# Altium PCB beacon_pcb.PcbDoc
Units mil, origin at the board's own origin, x right, y up, seen from the top; angles counter-clockwise.
Board outline 3137.8 x 2285.43 mil, 2 copper layers (Top Layer, Bottom Layer); 40 components, 32 nets, 199 pads, 108 vias.
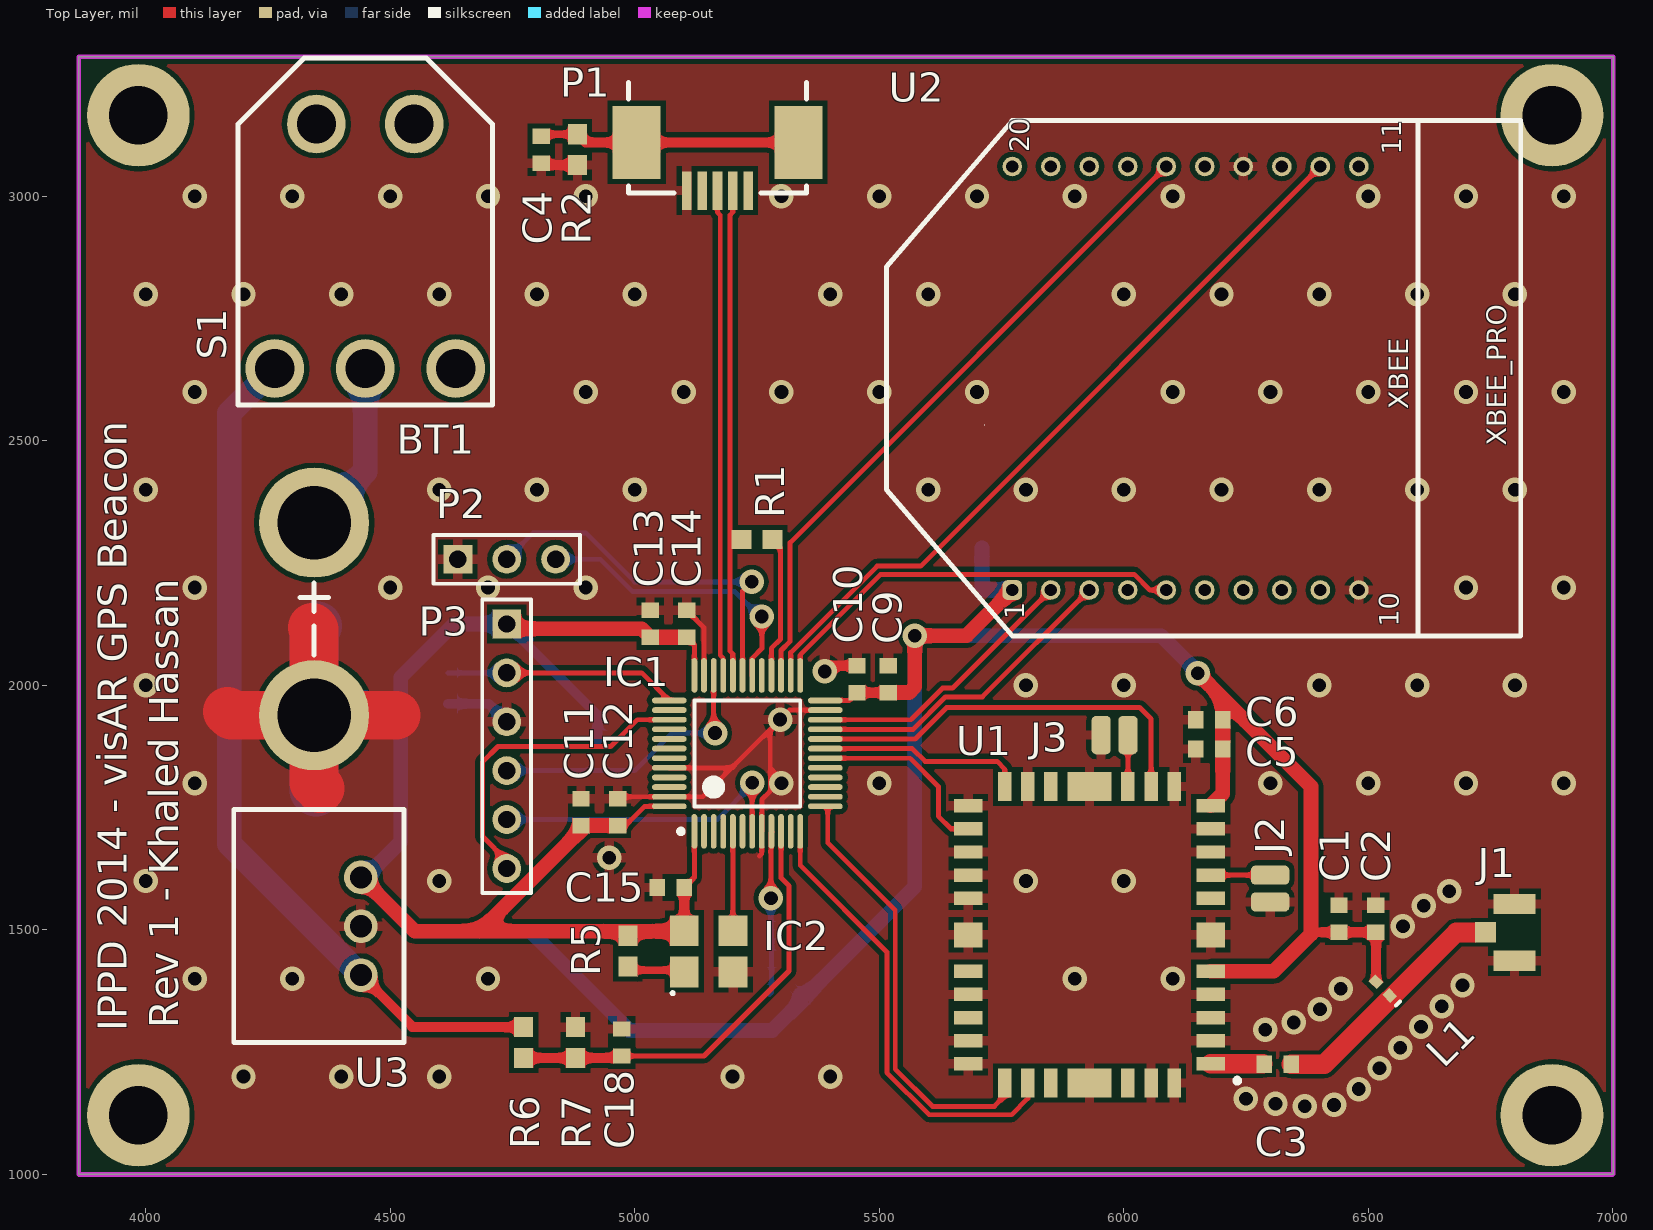
[diagram p0: Top Layer view]
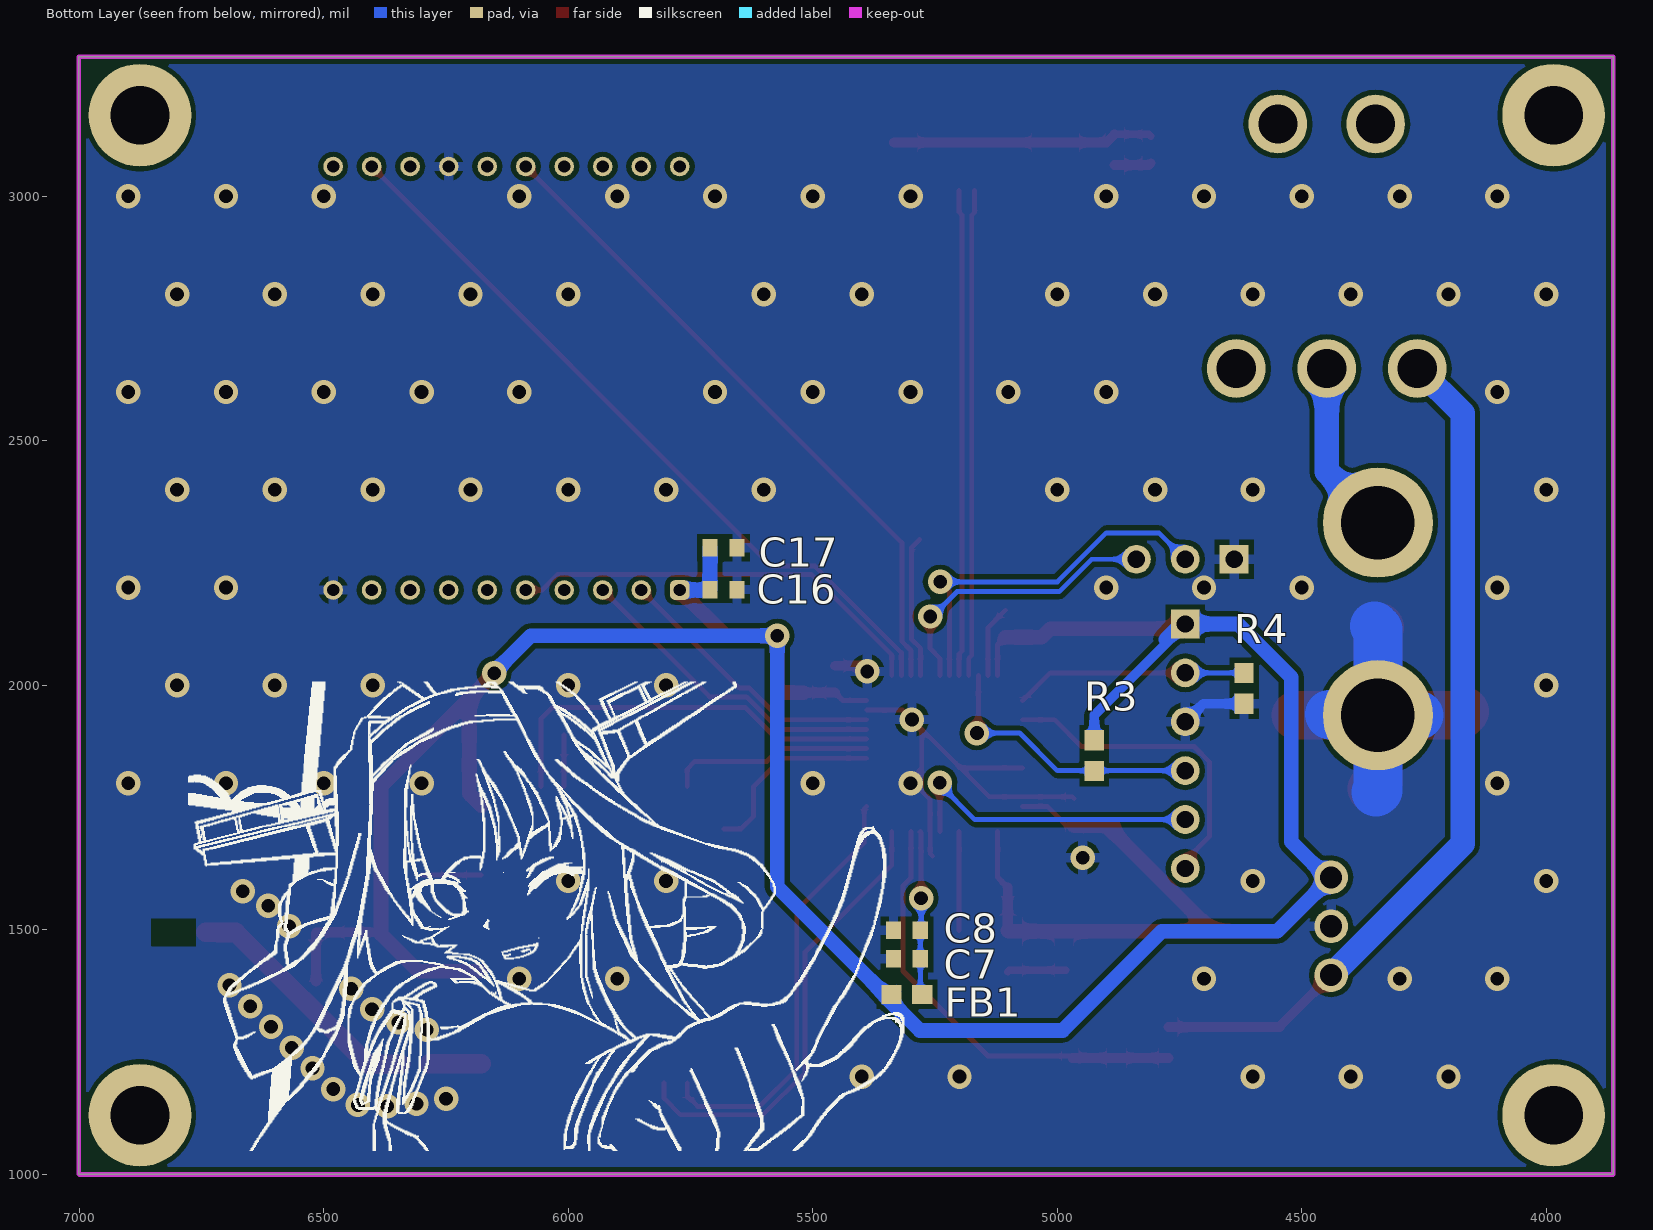
[diagram p1: Bottom Layer view, seen from below]

## Layer stack, top to bottom
Top Solder: solder mask 0.4, Solder Resist, Dk 3.5
Top Layer: signal copper 1.4
Dielectric 1: dielectric 12.6, FR-4, Dk 4.8
Bottom Layer: signal copper 1.4
Bottom Solder: solder mask 0.4, Solder Resist, Dk 3.5

## Board outline
3863.19,1000 3863.19,3285.43 7000.98,3285.43 7000.98,1000.98 7000,1000

## Design rules (kind name [scope] priority, off if disabled: settings)
Clearance GPS_Waveguide_Gap [(InNet('NetC3_1') OR InNet('NetC3_2')) vs InPolygon] p1: gap=7.88
Clearance Clearance_2 [InPolygon vs NOT ((InNet('NetC3_1') OR InNet('NetC3_2')))] p2: gap=10
Clearance [All] p3: gap=7
DiffPairsRouting [All] p1: maxlimit=10 minlimit=10 mostfreqgap=10 toplayer_minwidth=10 toplayer_maxwidth=15 toplayer_prefwidth=15 bottomlayer_minwidth=10 bottomlayer_maxwidth=15 bottomlayer_prefwidth=15 maxuncoupledlength=500
PolygonConnect [All] p1: connectstyle=Relief reliefconductorwidth=20 reliefentries=4 polygonreliefangle="90 Angle" airgapwidth=10
RoutingVias [All] p1: holewidth=28 width=50 viastyle="Through Hole" minholewidth=28 minwidth=50 maxholewidth=28 maxwidth=50
SolderMaskExpansion [All] p1: expansion=4
Width [All] p1: maxlimit=200 minlimit=10 preferedwidth=10 minimp=50.000000 maximp=50.000000 favimp=50.000000
29 further rules are at their usual default settings.

## Classes and differential pairs
differential pair USB: +USBD_P -USBD_N

## Components (designator, comment, footprint, x,y, rotation, side; value= is the part's Value field where it differs from the comment)
BT1 "BATWIRE" BATWIRE12 4344.49,2332.68 r270 top
C1 "Cap Semi" 1608[0603] 6440.08,1522.56 r270 top
C2 "Cap Semi" 1608[0603] 6515.08,1522.56 r270 top
C3 "Cap Semi" 1608[0603] 6315,1225 r180 top
C4 "Cap Semi" 1608[0603] 4809.06,3095.47 r90 top
C5 "Cap Semi" 1608[0603] 6175,1870 r0 top
C6 "Cap Semi" 1608[0603] 6175,1930 r0 top
C7 "Cap Semi" 1608[0603] 5307.44,1441.26 r180 bottom
C8 "Cap Semi" 1608[0603] 5307.44,1499.02 r180 bottom
C9 "Cap Semi" 1608[0603] 5518.7,2012.8 r270 top
C10 "Cap Semi" 1608[0603] 5454.72,2012.8 r270 top
C11 "Cap Semi" 1608[0603] 4890.31,1740.91 r270 top
C12 "Cap Semi" 1608[0603] 4965.31,1740.91 r270 top
C13 "Cap Semi" 1608[0603] 5031.5,2125.98 r270 top
C14 "Cap Semi" 1608[0603] 5106.3,2125.98 r270 top
C15 "Cap Semi" 1608[0603] 5073.82,1586.61 r0 top
C16 "Cap Semi" 1608[0603] 5682.64,2195.87 r0 bottom
C17 "Cap Semi" 1608[0603] 5682.64,2281.5 r0 bottom
C18 "Cap Semi" 1608[0603] 4973.43,1269.69 r270 top
FB1 "FBead" RES0603 5307.44,1368.11 r0 bottom
IC1 "STM32F103CBT6" STM-LQFP48_N 5230.31,1860.91 r90 top
IC2 "Si501/2/3" "3.2 x 5 mm 4-pin DFN" 5077.76,1395.67 r0 top
J1 "uFL Jack" H9161CT-ND 6799.21,1495.08 r270 top
J2 "SMD Jumper" "SMD 2PAD" 6295.28,1584.68 r90 top
J3 "SMD Jumper" "SMD 2PAD" 5981.38,1902.56 r0 top
L1 "Inductor" 0402-A 6530,1380 r135 top
P1 "UX60SC-MB-5ST" UX60SC-MB-5ST 5169.29,3011.81 r180 top
P2 "Header 3" HDR1X3 4638.27,2257.87 r0 top
P3 "Header 6" HDR1X6 4738.27,2125.63 r270 top
R1 "Res" RES0603 5250,2298.23 r180 top
R2 "Res" RES0603 4882.87,3095.47 r270 top
R3 "Res" RES0603 4924.21,1856.3 r270 bottom
R4 "Res" RES0603 4618.11,1994.09 r270 bottom
R5 "Res" RES0603 4986.22,1456.69 r270 top
R6 "Res" RES0603 4772.64,1269.69 r270 top
R7 "Res" RES0603 4878.94,1269.69 r90 top
S1 "M2012S2A2W30" M2012S2A2W30 4449,3148 r180 top
U1 "S1315F8-RAW" S1315F8-RAW 5930,1490 r90 top
U2 "XBEE" XBEE/PRO 5340,2160 r90 top
U3 "R-78E3.3-0.5" R-78E3.3-0.5 4439.96,1407.48 r90 top

## Footprints (in the part's own frame and the unit in brackets; to place one, negate y for a bottom-side part, rotate by r counter-clockwise, add the part's x,y. Pads: shape width x height; smd on the part's side, far side on the other; paste and mask are expansions set on the pad)
"3.2 x 5 mm 4-pin DFN" [mm] "Footprint for Si501 Oscillator"
  rect 1.5x1.6 smd: 1(0.6,0.47) 2(3.14,0.47) 3(3.14,2.61) 4(0.6,2.61)
  silkscreen extent -0.03,-0.67 0.03,-0.61
0402-A [mm] "Chip Inductor, Body 1.0x0.5mm, IPC High Density"
  rect 0.6x0.5 smd: 1(-0.5,0) 2(0.5,0)
  silkscreen extent -1.1,-0.15 -1.1,0.15, body extent -0.55,-0.3 0.55,0.3, height 0.55
1608[0603] [mm] "Chip Capacitor, Body 1.6x0.8mm, IPC High Density"
  rect 0.8x0.9 smd: 1(-0.7,0) 2(0.7,0)
  body extent -0.87,-0.48 0.87,0.48, height 1.3
BATWIRE12 [mm] "Two 12AWG wires soldered directly to the board"
  round 5.715 hole 3.81: +(0,0) -(10,0)
  silkscreen extent 3.13,-0.75 6.87,0.75
H9161CT-ND [mm]
  rect 1.05x2.2 smd: GND(-1.475,0) GND(1.475,0)
  rect 1.05x1.1 smd: SIG(0,-1.5)
  Mechanical 1 keep-out region: -0.65,-0.55 0.625,-0.55 0.625,1.1 -0.65,1.1
HDR1X3 [mm] "Connector; Header; 3 Position"
  rect 1.5x1.5 hole 0.9: 1(0,0)
  round 1.5 hole 0.9: 2(2.54,0) 3(5.08,0)
  silkscreen extent -1.27,-1.27 6.35,1.27
HDR1X6 [mm] "Connector; Header; 6 Position"
  rect 1.5x1.5 hole 0.9: 1(0,0)
  round 1.5 hole 0.9: 2(2.54,0) 3(5.08,0) 4(7.62,0) 5(10.16,0) 6(12.7,0)
  silkscreen extent -1.27,-1.27 13.97,1.27
M2012S2A2W30 [mil]
  round 120 hole 80: 0(-100,0) 0(100,0) 1(185,500) 2(0,500) 3(-185,500)
  silkscreen extent -260,-135 260,575
R-78E3.3-0.5 [mm]
  round 1.75 hole 1.15: 1(0,0) 2(2.54,0) 3(5.08,0)
  silkscreen extent -3.5,-2.25 8.6,6.6
RES0603 [mm] "Chip Resistor, 2-Leads, Body 1.60x0.80mm, IPC Medium Density"
  rect 1.05x1 smd: 1(-0.8,0) 2(0.8,0)
  body extent -0.88,-0.48 0.87,0.47, height 0.8
S1315F8-RAW [mm]
  rect 0.7x1.5 smd: 1(-6.7,-6.3) 2(-5.5,-6.3) 3(-4.3,-6.3) 4(-3.1,-6.3) 5(-1.9,-6.3) 7(1.9,-6.3) 8(3.1,-6.3) 9(4.3,-6.3) 10(5.5,-6.3) 11(6.7,-6.3) 19(6.7,6.3) 20(5.5,6.3) 21(4.3,6.3) 22(3.1,6.3) 23(1.9,6.3) 25(-1.9,6.3) 26(-3.1,6.3) 27(-4.3,6.3) 28(-5.5,6.3) 29(-6.7,6.3)
  rect 1.3x1.5 smd: 6(0,-6.3) 24(0,6.3)
  rect 1.5x0.7 smd: 12(7.7,-4.4) 13(7.7,-3.2) 14(7.7,-2) 16(7.7,2) 17(7.7,3.2) 18(7.7,4.4) 30(-7.7,4.4) 31(-7.7,3.2) 32(-7.7,2) 34(-7.7,-2) 35(-7.7,-3.2) 36(-7.7,-4.4)
  rect 1.5x2.3 smd: 15(7.7,0) 33(-7.7,0)
  silkscreen extent -7.7,-7.8 -7.45,-7.55
"SMD 2PAD" [mm]
  rrect50% 1x2 smd: 1(-0.702,-0.105) 2(0.695,-0.105)
STM-LQFP48_N [mm] "QFP, 48-Leads, Body 7x7mm, Pitch 0.5mm, IPC Medium Density"
  oval 1.8x0.3 smd: 1(-4.05,2.75) 2(-4.05,2.25) 3(-4.05,1.75) 4(-4.05,1.25) 5(-4.05,0.75) 6(-4.05,0.25) 7(-4.05,-0.25) 8(-4.05,-0.75) 9(-4.05,-1.25) 10(-4.05,-1.75) 11(-4.05,-2.25) 12(-4.05,-2.75) 25(4.05,-2.75) 26(4.05,-2.25) 27(4.05,-1.75) 28(4.05,-1.25) 29(4.05,-0.75) 30(4.05,-0.25) 31(4.05,0.25) 32(4.05,0.75) 33(4.05,1.25) 34(4.05,1.75) 35(4.05,2.25) 36(4.05,2.75)
  oval 0.3x1.8 smd: 13(-2.75,-4.05) 14(-2.25,-4.05) 15(-1.75,-4.05) 16(-1.25,-4.05) 17(-0.75,-4.05) 18(-0.25,-4.05) 19(0.25,-4.05) 20(0.75,-4.05) 21(1.25,-4.05) 22(1.75,-4.05) 23(2.25,-4.05) 24(2.75,-4.05) 37(2.75,4.05) 38(2.25,4.05) 39(1.75,4.05) 40(1.25,4.05) 41(0.75,4.05) 42(0.25,4.05) 43(-0.25,4.05) 44(-0.75,4.05) 45(-1.25,4.05) 46(-1.75,4.05) 47(-2.25,4.05) 48(-2.75,4.05)
  silkscreen extent -4.17,-2.75 2.75,3.57, body extent -3.5,-3.5 3.5,3.5, height 1.6
UX60SC-MB-5ST [mm] "USB Mini-B Recepticle"
  rect 0.5x2 smd: 1(-1.6,0) 2(-0.8,0) 3(0,0) 4(0.8,0) 5(1.6,0)
  rect 2.5x3.8 smd: SHD(-4.2,-2.5) SHD(4.2,-2.5)
  silkscreen extent -4.62,-5.63 4.62,0.13, body extent -4.9,-6.61 4.9,0.39, height 3.95
XBEE/PRO [mil]
  rrect50% 40x40 hole 25: 1(35,-432.09)
  round 40 hole 25: 2(35,-510.83) 3(35,-589.57) 4(35,-668.31) 5(35,-747.05) 6(35,-825.79) 7(35,-904.53) 8(35,-983.27) 9(35,-1062.01) 10(35,-1140.75) 11(901.14,-1140.75) 12(901.14,-1062.01) 13(901.14,-983.27) 14(901.14,-904.53) 15(901.14,-825.79) 16(901.14,-747.05) 17(901.14,-668.31) 18(901.14,-589.57) 19(901.14,-510.83) 20(901.14,-432.09)
  silkscreen extent -59,-1472 995,-175

## Part data
BT1: "Two large gauge leads soldered directly to the board."
C1 C2 C3 C4 C5 C6 C7 C8 C9 C10 C11 C12 C13 C14 C15 C16 C17 C18: "Capacitor (Semiconductor SIM Model)"
FB1: "Ferrite Bead"
IC1: library part STM32F103C8T6, "STM32 ARM-based 32-bit MCU with 64 Kbytes Flash, 48-pin LQFP, Industrial Temperature"
P1: "USB Mini B Metal Shield SMT"
P2: "Header, 3-Pin"
P3: "Header, 6-Pin"
S1: library part SW-SPDT, "SPDT Subminiature Toggle Switch, Right Angle Mounting, Vertical Actuation"

## Free pads (board coordinates)
  round 210 hole 120: 0(3985,1121) 0(3985,3166) 0(6876,1121) 0(6876,3166)

## Via types
v1: diameter 50, hole 28, Top Layer to Bottom Layer, tented both sides, 98 vias
v2: diameter 50, hole 28, Top Layer to Bottom Layer, 10 vias

## Nets (pads, with @x,y where several pads share a name; then routed paths per layer and width w, separated by ;. In a path a pad name is that pad's centre, name@x,y a point inside that pad or via, vN(x,y) a via of type N, cw(c..) or ccw(c..) an arc to the next point about the centre after c; other vN are vias at no path point)
+3.3: C1.2 C2.2 C5.2 C6.2 C9.2 C10.2 C11.2 C12.2 C13.2 C14.2 C15.2 C16.2 C17.2 FB1.2 IC1.1 IC1.24 IC1.36 IC1.48 IC2.4 L1.2 P3.1 R3.1 R5.1 U1.5 U1.11 U2.1 U3.3 | length 7492.9
  Top Layer w10: C12.2 4981.06,1713.35 5020.35,1752.64 IC1.48 ; C15.2 5122.05,1607.28 IC1.1 ; C14.2 5122.05,2082.68 IC1.36 ; IC1.24 5438.66,1969.17 C10.2
  Top Layer w20: IC2.4 C15.2 ; C10.2 C9.2 ; 6386.73,1495 C1.2 C2.2 ; L1.2 C2.2@6516.08,1494
  Top Layer w30: U3.3 4550.2,1497.24 4682.75,1497.24 ; P3.1 4738.27,2115.8 5014.13,2115.8 C13.2 C14.2 ; C12.2 C11.2 4890.32,1704.81 4682.75,1497.24 ; IC2.4 5100.2,1497.24 4682.75,1497.24 ; C9.2 5561.02,1985.24 5572.83,1997.05 v2(5572.83,2101.38) 5678.46,2101.38 U2.1 ; v2(6151.57,2024.61) 6202.56,1973.62 ; U1.5 6306.93,1415.2 6382.87,1491.14 6382.87,1793.31 6202.56,1973.62 ; U1.11 6202.56,1778.31 C5.2 C6.2 6202.56,1973.62
  Bottom Layer w20: P3.1 4924.21,1939.69 R3.1
  Bottom Layer w30: 4777.84,2093.85 4746.06,2125.63 P3.1 4630.55,2125.63 4521.65,2016.73 4521.65,1680.12 4449.02,1607.48 U3.3 4550.2,1497.24 4786.22,1497.24 4989.17,1294.29 5281.5,1294.29 5338.94,1351.73 FB1.2 5352.36,1368.11 5572.83,1588.58 v2(5572.83,2101.38) 6076.77,2101.38 6151.57,2026.57 v2(6151.57,2024.61) ; C17.2 C16.2 5711.06,2195 U2.1
+7.4: R6.1 S1.1 U3.1 | length 1768.6
  Top Layer w20: U3.1 4544.29,1303.15 4544.29,1301.18 R6.1
  Bottom Layer w50: S1.1@4263.82,2648.62 4171.26,2556.06 4171.26,1676.18 U3.1
BATTERYMONITOR: C18.2 IC1.10 R6.2 R7.1 | length 903.2
  Top Layer w10: C18.2 5141.73,1242.13 5315.54,1415.94 5315.54,1589.97 5299.21,1606.3 IC1.10
  Top Layer w20: R6.2 R7.1 C18.2@4969.49,1238.19
CLK_8M: IC1.5 IC2.3 | length 203.9
  Top Layer w10: IC2.3@5200.79,1498.43 IC1.5 ; IC2.3@5200.79,1499.02 IC2.3
DEBUG_RX: IC1.31 P2.2 | length 764.3
  Top Layer w10: IC1.31 5220.47,2192.77 v2(5239.43,2211.72)
  Bottom Layer w10: P2.2 4792.4,2312.01 4899.61,2312.01 4999.89,2211.72 v2(5239.43,2211.72)
DEBUG_TX: IC1.30 P2.3 | length 599.1
  Top Layer w10: IC1.30 5240.16,2055.52 5260.1,2075.46 v2(5260.1,2140.85)
  Bottom Layer w10: P2.3 4929.7,2257.87 4995.98,2191.6 5205.07,2191.6 5255.81,2140.85 v2(5260.1,2140.85)
GND: BT1.- C1.1 C2.1 C4.1 C5.1 C6.1 C7.1 C8.1 C9.1 C10.1 C11.1 C12.1 C13.1 C14.1 C15.1 C16.1 C17.1 C18.1 IC1.8 IC1.23 IC1.35 IC1.44 IC1.47 IC2.2 J1.GND J2.1 J3.1 P1.5 P2.1 P3.3 R2.2 R4.2 R7.2 U1.2 U1.3 U1.4 U1.6 U1.9 U1.10 U1.12 U1.15 U1.17 U1.19 U1.21 U1.22 U1.23 U1.24 U1.26 U1.28 U1.29 U1.33 U1.35 U1.36 U2.10 U2.14 U3.2 | length 2537.3
  Top Layer w10: C12.1 4969.17,1772.32 IC1.47 5139.45,1772.32 5198.5,1831.38 ; IC1.44 5198.5,1831.38 ; C14.1 5141.73,2118.11 IC1.35 ; 5254.92,1650.59 5259.84,1655.51 IC1.8 5260.28,1701.9 5260.28,1766.82 5277.16,1783.7 5277.16,1910.03 ; IC1.23 5316.61,1949.49 v2(5297.24,1930.12) 5277.16,1910.03 ; 5198.5,1831.38 5277.16,1910.03
  Top Layer w20: C4.1 4812.99,3063.98 R2.2 ; v2(5388.78,2028.54) 5400.59,2040.35 C10.1
  Top Layer w100: 4167.32,1946.85 4175.2,1938.98 BT1.- ; 4340.55,2118.11 4344.49,2114.17 BT1.- ; 4356.3,1789.37 4344.49,1801.18 BT1.- ; 4511.81,1938.98 BT1.-
  Bottom Layer w20: R4.2 4701.3,1962.6 P3.3
  Bottom Layer w100: BT1.-@4259.84,1938.98 BT1.- ; 4348.43,1781.5 4344.49,1785.43 BT1.- ; 4351.38,2121.06 4344.49,2114.17 BT1.- ; BT1.-@4443.9,1940.94 4441.93,1938.98 BT1.-
  other v1: 6370.21,1139.29 6430.15,1142.02 6310.42,1144.33 6250,1154.53 6480.64,1174.43 4200,1200 4400,1200 4600,1200 5200,1200 5400,1200 6523.07,1216.86 6565.49,1259.29 6289.37,1296.07 6607.92,1301.71 6347.55,1310.71 6401.26,1337.46 6650.35,1344.14 6443.68,1379.89 6692.77,1386.57 4100,1400 4300,1400 4700,1400 5900,1400 6100,1400 6570.96,1507.17 6613.39,1549.6 6665.62,1579.13 4000,1600 4600,1600 5800,1600 6000,1600 4100,1800 5300,1800 5500,1800 6300,1800 6500,1800 6700,1800 6900,1800 4000,2000 5800,2000 6000,2000 6400,2000 6600,2000 6800,2000 4100,2200 4500,2200 4700,2200 4900,2200 6700,2200 6900,2200 4000,2400 4600,2400 4800,2400 5000,2400 5600,2400 5800,2400 6000,2400 6200,2400 6400,2400 6600,2400 6800,2400 4100,2600 4900,2600 5100,2600 5300,2600 5500,2600 5700,2600 6100,2600 6300,2600 6500,2600 6700,2600 6900,2600 4000,2800 4200,2800 4400,2800 4600,2800 4800,2800 5000,2800 5400,2800 5600,2800 6000,2800 6200,2800 6400,2800 6600,2800 6800,2800 4100,3000 4300,3000 4500,3000 4700,3000 4900,3000 5300,3000 5500,3000 5700,3000 5900,3000 6100,3000 6500,3000 6700,3000 6900,3000
  other v2: 4947.83,1647.64
GPS_1PPS: IC1.18 U1.20 | length 387.8
  Top Layer w10: IC1.18 5563.31,1851.06 5621.06,1793.31 5621.06,1732.28 5646.81,1706.54 U1.20
GPS_DIN: IC1.12 U1.31 | length 935.8
  Top Layer w10: IC1.12 5338.58,1631.89 5515.75,1454.72 5515.75,1208.24 5601.94,1122.05 5770.67,1122.05 5804.02,1155.39 U1.31
GPS_DOUT: IC1.13 U1.30 | length 887.5
  Top Layer w10: IC1.13 5394.76,1747.64 5394.76,1678.07 5532.75,1540.09 5532.75,1215.28 5608.98,1139.05 5735.5,1139.05 5756.77,1160.32 U1.30
GPS_FIX: IC1.19 U1.18 | length 420.1
  Top Layer w10: IC1.19 5567.66,1870.75 5593.92,1844.49 5741.14,1844.49 5756.77,1828.86 U1.18
GPS_RSTN: IC1.20 U1.13 | length 840.7
  Top Layer w10: IC1.20 5573.71,1890.43 5638,1954.72 6032.48,1954.72 6055.98,1931.22 U1.13
NetBT1_+: BT1.+ S1.2 | length 359.2
  Bottom Layer w50: BT1.+ 4448.82,2437.01 S1.2@4448.82,2648.62
NetC3_1: C3.1 J1.SIG L1.1 | length 510.2
  Top Layer w40: C3.1 6410,1225 6680,1495 J1.SIG@6740.94,1495
NetC3_2: C3.2 U1.1 | length 106.7
  Top Layer w40: U1.1 C3.2@6284.76,1226.22
NetC4_2: C4.2 P1.SHD R2.1 | length 534.2
  Top Layer w15: C4.2 4812.99,3126.97 R2.1
  Top Layer w20: R2.1 4899.61,3110.24 5003.94,3110.24 P1.SHD@5334.65,3110.24
NetIC2_1: IC2.1 R5.2 | length 120.5
  Top Layer w15: R5.2@4982.28,1417.64 5097.91,1417.64 IC2.1
NetJ2_2: J2.2 U1.8 | length 121.4
  Top Layer w10: U1.8 J2.2
NetJ3_2: J3.2 U1.14 | length 105.3
  Top Layer w10: U1.14 J3.2
RSTIN: IC1.7 P3.5 | length 635.8
  Top Layer w10: IC1.7 v2(5240.16,1801.18)
  Bottom Layer w10: P3.5 5168.54,1725.63 5241.14,1798.23 v2(5240.16,1801.18)
SWCLK: IC1.37 P3.2 R4.1 | length 476.2
  Top Layer w10: P3.2 5014.41,2025.63 IC1.37
  Bottom Layer w10: R4.1 4738.23,2025.59 P3.2
SWDIO: IC1.34 P3.4 R3.2 | length 577
  Top Layer w10: IC1.34 5161.42,1905.51 v2(5164.37,1902.56)
  Bottom Layer w10: P3.4 4999.84,1825.63 5076.77,1902.56 v2(5164.37,1902.56)
SWO: IC1.39 P3.6 | length 655.9
  Top Layer w10: P3.6 4738.27,1641.65 4688.98,1690.94 4688.98,1843.5 4720.47,1875 4950.79,1875 5005.59,1929.8 IC1.39
USBD_N: IC1.32 P1.2 R1.2 | length 996.2
  Top Layer w10: IC1.32 5200.79,2064.12 5195.04,2069.87 5195.04,2961.69 5200.79,2967.44 P1.2
USBD_P: IC1.33 P1.3 | length 996.3
  Top Layer w10: P1.3 5169.29,2967.44 5175.04,2961.69 5175.04,2061.58 5181.1,2055.52 IC1.33
USBPULLUP: IC1.28 R1.1 | length 292.6
  Top Layer w10: IC1.28 5279.53,2075.79 5298.23,2094.49 5298.23,2281.5 R1.1
VDDACAPS: C7.2 C8.2 FB1.1 IC1.9 | length 337.6
  Top Layer w10: v2(5278.54,1564.96) 5278.54,1698.5 5280.51,1700.47 IC1.9
  Bottom Layer w10: FB1.1 5279.88,1372.05 C7.2 C8.2 5279.53,1499.37 5280.51,1500.35 5278.54,1502.32 v2(5278.54,1564.96)
XBEE_CTS: IC1.26 U2.12 | length 1541.6
  Top Layer w10: IC1.26 5318.9,2067.07 5495.82,2244 5584.87,2244 U2.12
XBEE_DIN: IC1.21 U2.3 | length 657.8
  Top Layer w10: IC1.21 5569.35,1910.12 5635.61,1976.38 5710.94,1976.38 U2.3
XBEE_DOUT: IC1.22 U2.2 | length 570.9
  Top Layer w10: IC1.22 5565,1929.8 5629.82,1994.63 5650.46,1994.63 U2.2
XBEE_RESET: IC1.25 U2.5 | length 872.1
  Top Layer w10: IC1.25 5338.58,2062.72 5502.86,2227 6021.56,2227 6053.56,2195 U2.5
XBEE_RTS: IC1.27 U2.16 | length 1367.1
  Top Layer w10: IC1.27 5299.21,2071.43 5317.91,2090.13 5317.91,2292.01 U2.16
pads on no net: IC1.2 IC1.3 IC1.4 IC1.6 IC1.11 IC1.14 IC1.15 IC1.16 IC1.17 IC1.29 IC1.38 IC1.40 IC1.41 IC1.42 IC1.43 IC1.45 IC1.46 P1.1 P1.4 S1.0 S1.3 U1.7 U1.16 U1.25 U1.27 U1.32 U1.34 U2.4 U2.6 U2.7 U2.8 U2.9 U2.11 U2.13 U2.15 U2.17 U2.18 U2.19 U2.20

## Polygon pours and split planes (outlines as drawn)
GND on Top Layer "Top Layer-GND" (solid, pour order 4): 3863.19,3285.43 7000.98,3285.43 7000.98,1007.87 3863.19,1007.87
GND on Bottom Layer "Bottom Layer-GND" (solid, pour order 6): 7000.98,3285.43 3863.19,3285.43 3863.19,1000 7000,1000

## Keep-outs
Keep-Out Layer:
  the board outline again, w10

## Other copper
Top Layer:
  pour cut-out: 6769.69,1522.48 6852.52,1522.48 6852.52,1467.68 6769.69,1467.68
Bottom Layer:
  pour cut-out: 6761.97,1522.48 6852.52,1522.48 6852.52,1467.68 6851.38,1466.54 6761.97,1466.54

## Silkscreen, mask and mechanical layers (free items; w line width, h text height)
Top Overlay:
  lines w1: 5715.05,2533.02 5716.05,2533.02
  text "Rev 1 - Khaled Hassan" at 4066.93,1299.21 h60 r90
  text "IPPD 2014 - visAR GPS Beacon" at 3961.61,1292.32 h60 r90
Bottom Overlay:
  drawing of 8908 lines, arcs and shapes, not listed

## Text inside footprints (layer, text, board x,y; h text height)
U2: Top Overlay "XBEE_PRO" at 6782.09,2490 h40 r90; Top Overlay "1" at 5797.09,2135 h40 r90; Top Overlay "10" at 6562.09,2120 h40 r90; Top Overlay "11" at 6567.09,3085 h40 r90; Top Overlay "20" at 5807.09,3090 h40 r90